# Altium PCB PCB1_HUY.PcbDoc (part 1 of 4)
Units mm, origin at the board's own origin, x right, y up, seen from the top; angles counter-clockwise.
Board outline 93 x 90.05 mm, 2 copper layers (Top Layer, Bottom Layer); 361 components, 379 nets, 1489 pads, 0 vias.
Unrouted connection lines stored in the file: 824.
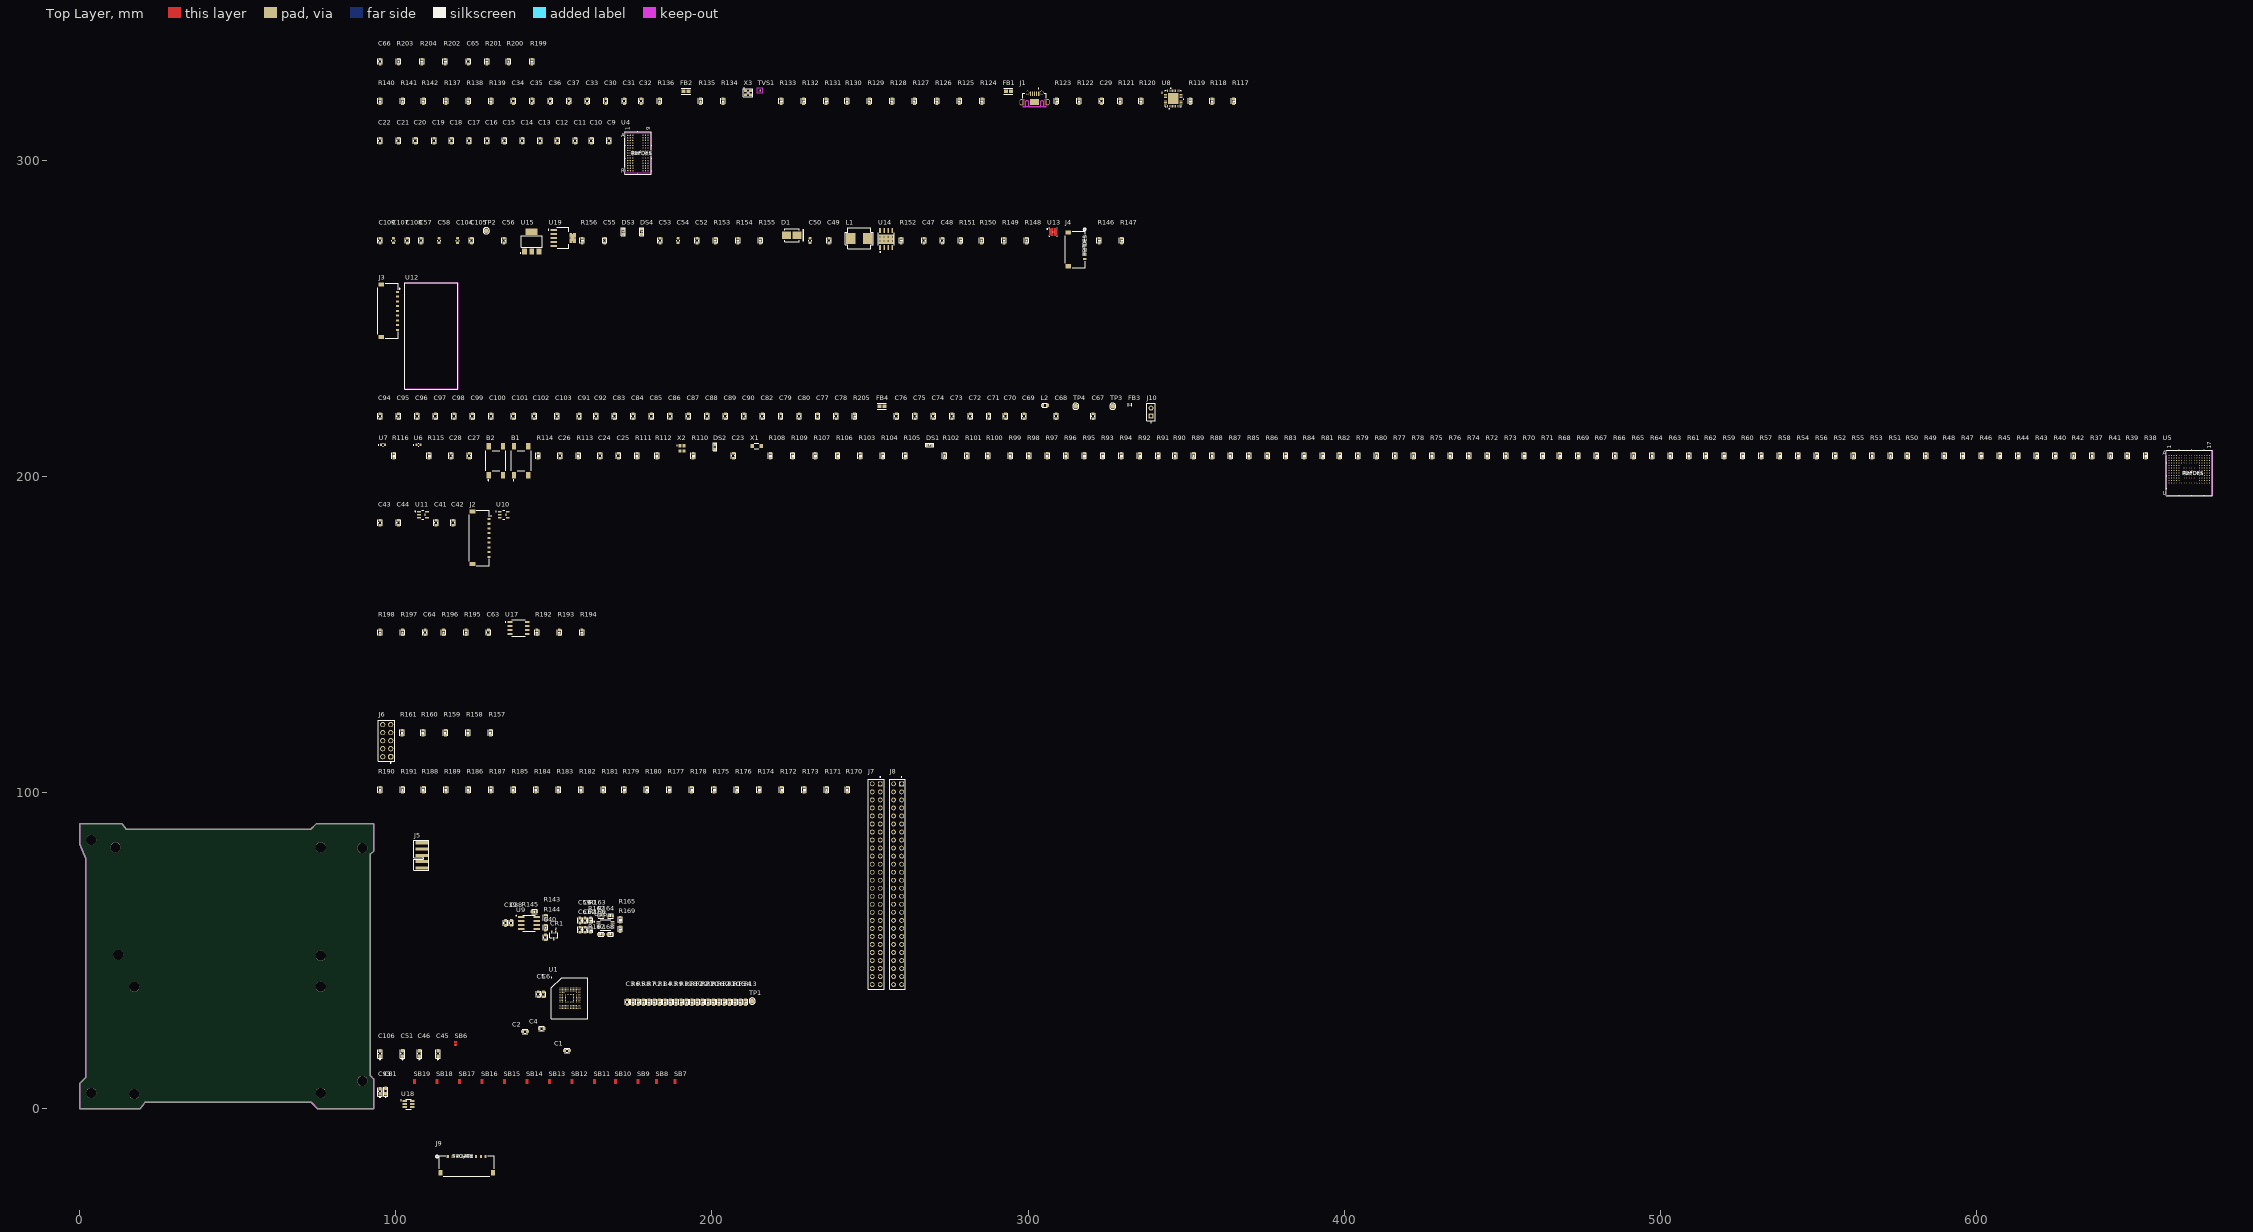
[diagram p0: Top Layer view]
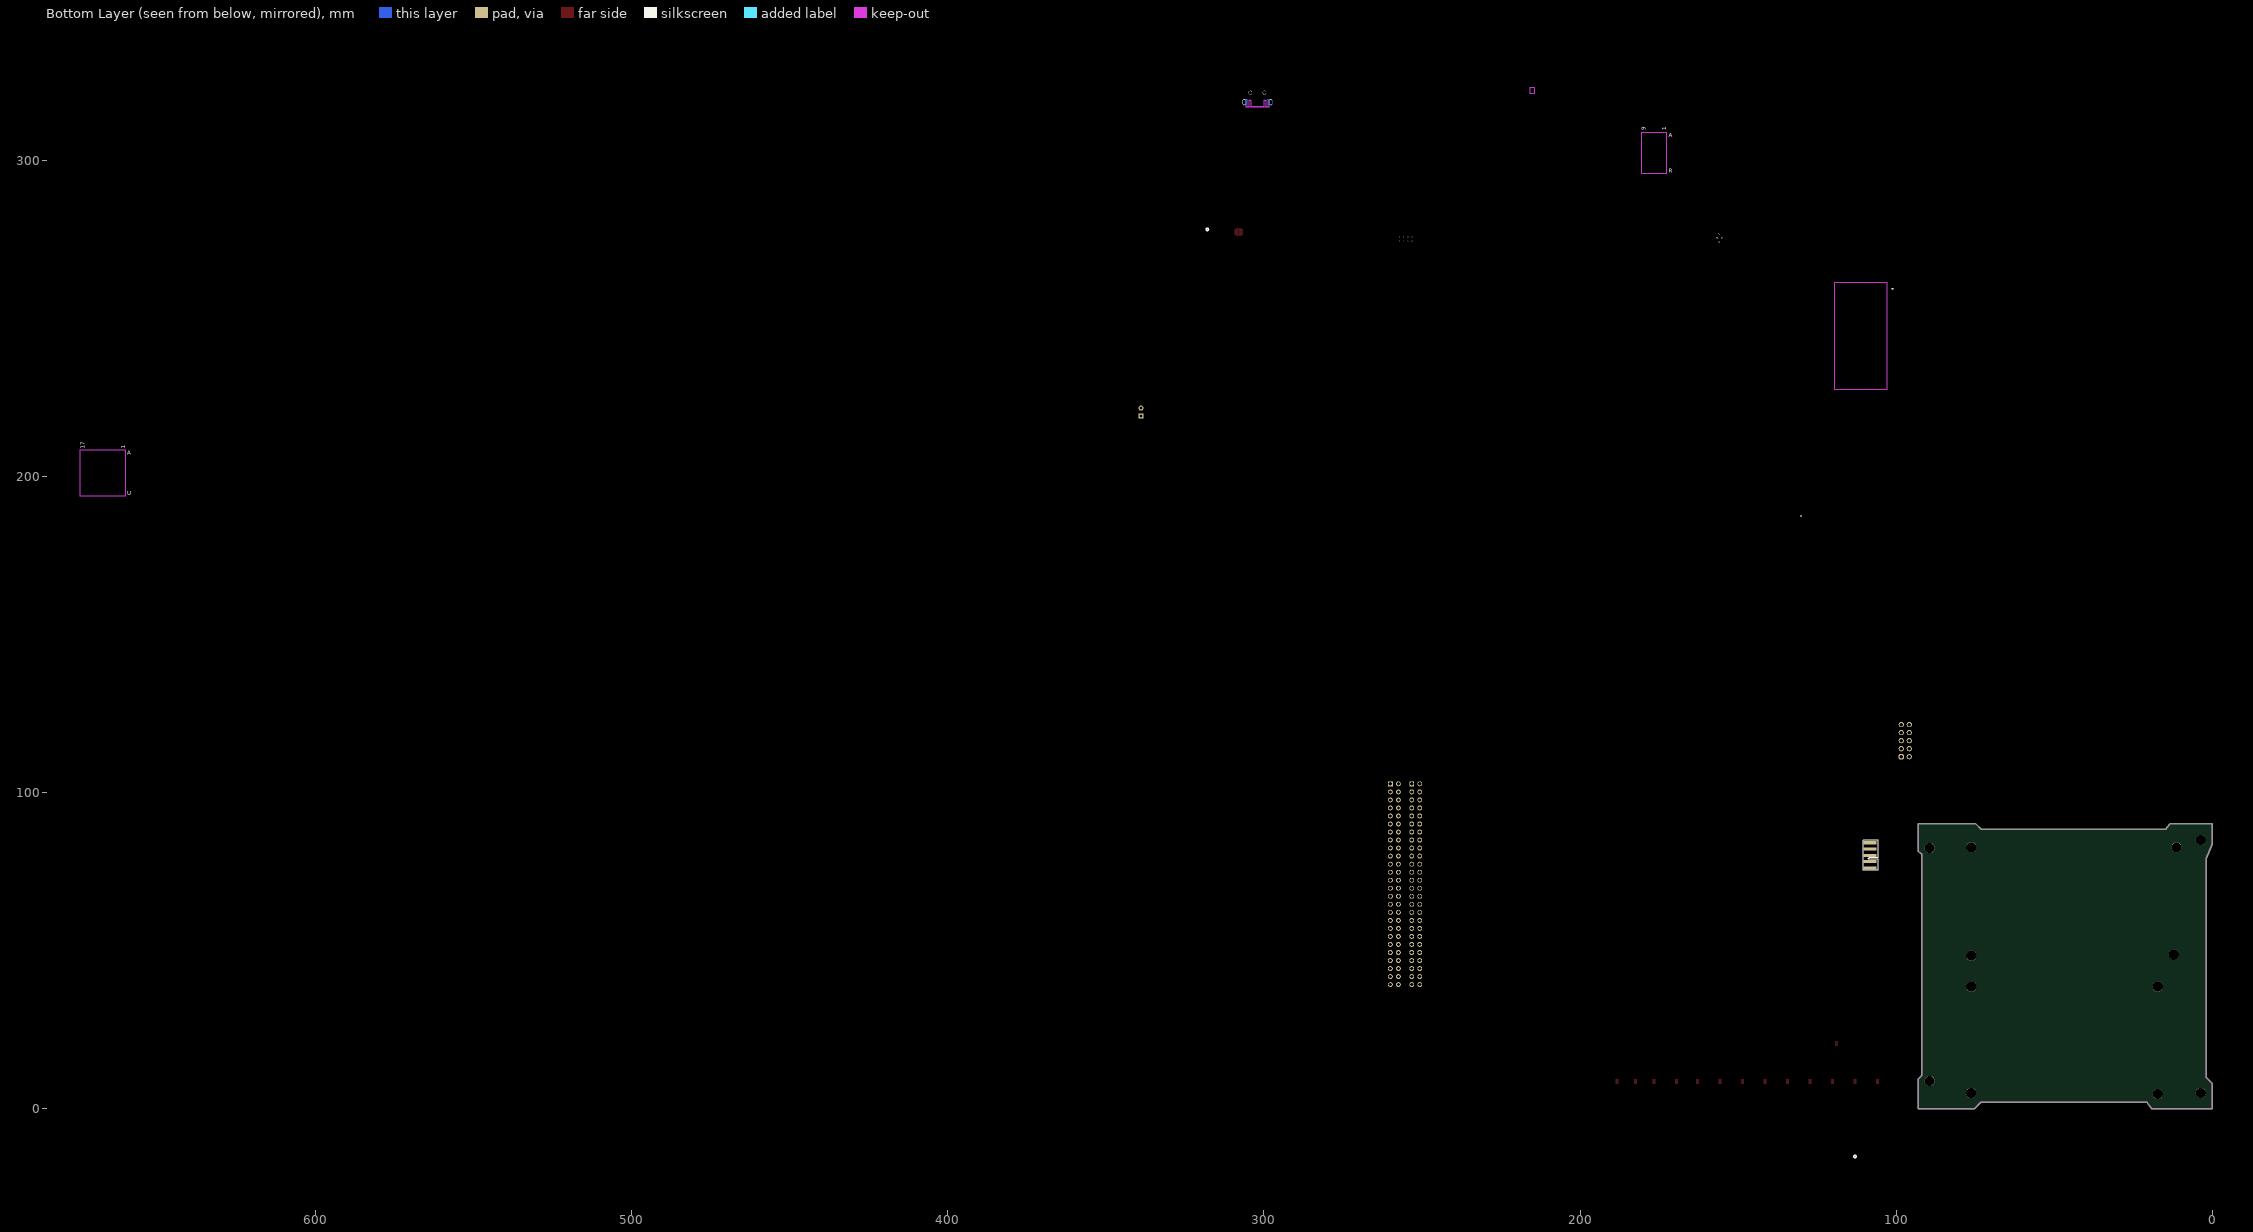
[diagram p1: Bottom Layer view, seen from below]

## Layer stack, top to bottom
Top Solder: solder mask 0.0102, Solder Resist, Dk 3.5
Top Layer: signal copper 0.0356
Dielectric 1: dielectric 0.32, FR-4, Dk 4.8
Bottom Layer: signal copper 0.0356
Bottom Solder: solder mask 0.0102, Solder Resist, Dk 3.5

## Board outline
79.527,0 75.26,0 73.254,2.007 71.831,2.007 20.676,2.007 19.2,0 0,0 0,7.925 0.889,8.814 1.9,9.825 1.9,67.474 1.9,79.126 0,83.713 0,90.05 13.513,90.05 14.753,88.392 73.127,88.392 74.785,90.05 93,90.05 93,82.069 93,81.35 91.9,80.45 91.9,10.525 93,9.425 93,0

## Design rules (kind name [scope] priority, off if disabled: settings)
Clearance ROOM_MCU [WithinRoom('RoomDefinition_1')] p1: gap=0 ignorepadtopadclearanceinfootprint=FALSE
Clearance [All] p2: gap=0.127 ignorepadtopadclearanceinfootprint=FALSE
ComponentClearance [All] p1: gap=0.1 collisioncheckmode=3 verticalgap=0.1 showdistances=FALSE
DiffPairsRouting [All] p1: maxlimit=0.254 minlimit=0.254 mostfreqgap=0.254 toplayer_minwidth=0.381 toplayer_maxwidth=0.381 toplayer_prefwidth=0.381 bottomlayer_minwidth=0.381 bottomlayer_maxwidth=0.381 bottomlayer_prefwidth=0.381 maxuncoupledlength=12.7
MatchedLengths "Schematic Matched Net Lengths_15" [InNet('SDIO1_CMD')] p1: tolerance=2.54 checknetsindiffpair=FALSE checkdiffpairvsdiffpair=TRUE checkxsignals=TRUE checkothers=TRUE
MatchedLengths "Schematic Matched Net Lengths_14" [InNet('SDIO1_CK')] p2: tolerance=2.54 checknetsindiffpair=FALSE checkdiffpairvsdiffpair=TRUE checkxsignals=TRUE checkothers=TRUE
MatchedLengths "Schematic Matched Net Lengths_11" [InNetClass('SDIO1_D[0..7]')] p3: tolerance=2.54 checknetsindiffpair=FALSE checkdiffpairvsdiffpair=TRUE checkxsignals=TRUE checkothers=TRUE
MatchedLengths "Schematic Matched Net Lengths" [InNetClass('SDRAM_A[0..11]')] p4: tolerance=2.54 checknetsindiffpair=FALSE checkdiffpairvsdiffpair=TRUE checkxsignals=TRUE checkothers=TRUE
PolygonConnect [All] p1: connectstyle=Relief reliefconductorwidth=0.254 reliefentries=4 polygonreliefangle="90 Angle" airgapwidth=0.254
RoutingVias [All] p1: holewidth=0.3 width=0.6 viastyle="Through Hole" minholewidth=0.05 minwidth=0.1 maxholewidth=0.8 maxwidth=1
SolderMaskExpansion [All] p1: expansion=0.102 istentingtop=FALSE
SupplyNets "Schematic Supply Nets_23" [InNet('5V')] p1: voltage=0.000
SupplyNets "Schematic Supply Nets_19" [InNet('3V3')] p2: voltage=0.000
SupplyNets "Schematic Supply Nets_22" [InNet('VDDA')] p3: voltage=0.000
SupplyNets "Schematic Supply Nets_21" [InNet('12V')] p4: voltage=0.000
SupplyNets "Schematic Supply Nets_20" [InNet('5V_SW1')] p5: voltage=0.000
SupplyNets "Schematic Supply Nets_17" [InNet('3V3_SW3')] p6: voltage=0.000
SupplyNets "Schematic Supply Nets_16" [InNet('VDD_MCU')] p7: voltage=0.000
SupplyNets "Schematic Supply Nets_15" [InNet('3V3_SW1')] p8: voltage=0.000
SupplyNets "Schematic Supply Nets_14" [InNet('1V8')] p9: voltage=0.000
SupplyNets "Schematic Supply Nets_13" [InNet('VBAT_BUS')] p10: voltage=0.000
SupplyNets "Schematic Supply Nets_12" [InNet('12V_CONN')] p11: voltage=0.000
SupplyNets "Schematic Supply Nets_11" [InNet('5V_BUS')] p12: voltage=0.000
SupplyNets "Schematic Supply Nets_10" [InNet('VDD_SDC')] p13: voltage=0.000
SupplyNets "Schematic Supply Nets_9" [InNet('3V3_BUS')] p14: voltage=0.000
SupplyNets "Schematic Supply Nets_8" [InNet('GND')] p15: voltage=0.000
SupplyNets "Schematic Supply Nets_7" [InNet('GND-SD')] p16: voltage=0.000
SupplyNets "Schematic Supply Nets_6" [InNet('5V_SW3')] p17: voltage=0.000
SupplyNets "Schematic Supply Nets_4" [InNet('VBUS')] p18: voltage=0.000
SupplyNets "Schematic Supply Nets_3" [InNet('5V_SW2')] p19: voltage=0.000
SupplyNets "Schematic Supply Nets_2" [InNet('3V3_SW2')] p20: voltage=0.000
SupplyNets "Schematic Supply Nets" [InNet('3.3V')] p21: voltage=0.000
Width [All] p1: maxlimit=0.254 minlimit=0.254 preferedwidth=0.254
28 further rules are at their usual default settings.

## Classes and differential pairs
net class SDRAM_D[0..31]: SDRAM_D0 SDRAM_D1 SDRAM_D2 SDRAM_D3 SDRAM_D4 SDRAM_D5 SDRAM_D6 SDRAM_D7 SDRAM_D8 SDRAM_D9 SDRAM_D10 SDRAM_D11 SDRAM_D12 SDRAM_D13 SDRAM_D14 SDRAM_D15 SDRAM_D16 SDRAM_D17 SDRAM_D18 SDRAM_D19 SDRAM_D20 SDRAM_D21 SDRAM_D22 SDRAM_D23 SDRAM_D24 SDRAM_D25 SDRAM_D26 SDRAM_D27 SDRAM_D28 SDRAM_D29 SDRAM_D30 SDRAM_D31
net class ULPI_D[0..7]: ULPI_D0 ULPI_D1 ULPI_D2 ULPI_D3 ULPI_D4 ULPI_D5 ULPI_D6 ULPI_D7
net class SDRAM_A[0..11]: SDRAM_A0 SDRAM_A1 SDRAM_A2 SDRAM_A3 SDRAM_A4 SDRAM_A5 SDRAM_A6 SDRAM_A7 SDRAM_A8 SDRAM_A9 SDRAM_A10 SDRAM_A11
net class SDIO1_D[0..7]: SDIO1_D0 SDIO1_D1 SDIO1_D2 SDIO1_D3 SDIO1_D4 SDIO1_D5 SDIO1_D6 SDIO1_D7
net class N000-1_[0..9]: FPGA_D0 FPGA_D1 FPGA_D2 FPGA_D3 FPGA_D4 FPGA_D5 FPGA_D6 FPGA_D7 FPGA_D8 FPGA_D9
net class N000-2_[0..4]: FPGA_STATUS0 FPGA_STATUS1 FPGA_STATUS2 FPGA_STATUS3 FPGA_STATUS4
component class WATCHDOG: C65 C66 R199 R200 R201 R202 R203 R204 U18
component class USB_HS_DEVICE: C29 C30 C31 C32 C33 C34 C35 C36 C37 FB1 FB2 J1 L4 L5 R117 R118 R119 R120 R121 R122 R123 R124 R125 R126 R127 R128 R129 R130 R131 R132 R133 R134 R135 R136 R137 R138 R139 R140 R141 R142 TVS1 U8 X3
component class SDRAM: C9 C10 C11 C12 C13 C14 C15 C16 C17 C18 C19 C20 C21 C22 U4
component class POWER: C45 C46 C47 C48 C49 C50 C51 C52 C53 C54 C55 C56 C57 C58 C104 C105 C106 C107 C108 C109 D1 DS3 DS4 J4 L1 R146 R147 R148 R149 R150 R151 R152 R153 R154 R155 R156 SB6 TP2 U13 U14 U15 U19
component class MODULE_FPGA: J3 U12
component class MCU: B1 B2 C23 C24 C25 C26 C27 C28 DS1 DS2 HW9 HW10 LD1 LD2 R37 R38 R39 R40 R41 R42 R43 R44 R45 R46 R47 R48 R49 R50 R51 R52 R53 R54 R55 R56 R57 R58 R59 R60 R61 R62 R63 R64 R65 R66 R67 R68 R69 R70 R71 R72 R73 R74 R75 R76 R77 R78 R79 R80 R81 R82 R83 R84 R85 R86 R87 R88 R89 R90 R91 R92 R93 R94 R95 R96 R97 R98 R99 R100 R101 R102 R103 R104 R105 R106 R107 R108 R109 R110 R111 R112 R113 R114 R115 R116 U5 U6 U7 X1 X2
component class MCU_POWER: C67 C68 C69 C70 C71 C72 C73 C74 C75 C76 C77 C78 C79 C80 C81 C82 C83 C84 C85 C86 C87 C88 C89 C90 C91 C92 C93 C94 C95 C96 C97 C98 C99 C100 C101 C102 C103 FB3 FB4 HW11 J10 JP1 L2 L3 R205 SB7 SB8 SB9 SB10 SB11 SB12 SB13 SB14 SB15 SB16 SB17 SB18 SB19 TP3 TP4
component class LVDS: C41 C42 C43 C44 J2 U10 U11
component class I2C: C59 C60 C61 C62 R162 R163 R164 R165 R166 R167 R168 R169 U16
component class FRAM: C63 C64 R192 R193 R194 R195 R196 R197 R198 U17
component class eMMC: C1 C2 C3 C4 C5 C6 R1 R2 R3 R4 R5 R6 R7 R8 R9 R10 R11 R12 R13 R14 R15 R16 R17 R18 R19 R20 R21 R22 TP1 U1
component class DEBUG: J5 J6 R157 R158 R159 R160 R161
component class CONNECTOR: J7 J8 R170 R171 R172 R173 R174 R175 R176 R177 R178 R179 R180 R181 R182 R183 R184 R185 R186 R187 R188 R189 R190 R191
component class CONNECT_EXP: J9
component class CAN: C38 C39 C40 CR1 R143 R144 R145 U9
differential pair USB_HS: +USB_HS_P -USB_HS_N
differential pair LVDS_TxD: +LVDS_TxD_P -LVDS_TxD_N
differential pair LVDS_TxC: +LVDS_TxC_P -LVDS_TxC_N
differential pair FPGA_TxD: +FPGA_TxD_P -FPGA_TxD_N
differential pair FPGA_TxC: +FPGA_TxC_P -FPGA_TxC_N

## Components (designator, comment, footprint, x,y, rotation, side; value= is the part's Value field where it differs from the comment)
B1 "4-1437565-1" FP-4-1437565-1-MFG 139.649,204.927 r90 top
B2 "4-1437565-1" FP-4-1437565-1-MFG 131.674,204.927 r90 top
C1 "100nF/16V" CAP_C_1608X80 154.153,18.364 r0 top value=33pF
C2 "2.2uF/10V" CAP_C_1608X80 140.881,24.409 r0 top value=33pF
C3 "100nF/16V" CAP_C_1608X80 173.253,33.705 r90 top value=33pF
C4 "2.2uF/10V" CAP_C_1608X80 146.126,25.375 r0 top value=33pF
C5 "100nF/16V" CAP_C_1608X80 145.085,36.175 r90 top value=33pF
C6 "2.2uF/10V" CAP_C_1608X80 146.71,36.144 r90 top value=33pF
C9 "100nF/16V" CAP_C_1608X80 167.437,306.146 r90 top value=33pF
C10 "100nF/16V" CAP_C_1608X80 161.849,306.146 r90 top value=33pF
C11 "100nF/16V" CAP_C_1608X80 156.769,306.146 r90 top value=33pF
C12 "100nF/16V" CAP_C_1608X80 151.181,306.146 r90 top value=33pF
C13 "100nF/16V" CAP_C_1608X80 145.593,306.146 r90 top value=33pF
C14 "100nF/16V" CAP_C_1608X80 140.005,306.146 r90 top value=33pF
C15 "100nF/16V" CAP_C_1608X80 134.417,306.146 r90 top value=33pF
C16 "100nF/16V" CAP_C_1608X80 128.829,306.146 r90 top value=33pF
C17 "100nF/16V" CAP_C_1608X80 123.241,306.146 r90 top value=33pF
C18 "100nF/16V" CAP_C_1608X80 117.653,306.146 r90 top value=33pF
C19 "100nF/16V" CAP_C_1608X80 112.065,306.146 r90 top value=33pF
C20 "100nF/16V" CAP_C_1608X80 106.223,306.146 r90 top value=33pF
C21 "100nF/16V" CAP_C_1608X80 100.889,306.146 r90 top value=33pF
C22 "100nF/16V" CAP_C_1608X80 95.047,306.146 r90 top value=33pF
C23 "10nF/16V" CAP_C_1608X80 206.781,206.502 r90 top value=33pF
C24 "1.5pF/50V" CAP_C_1608X80 164.592,206.502 r90 top value=33pF
C25 "1.5pF/50V" CAP_C_1608X80 170.434,206.502 r90 top value=33pF
C26 "100nF/16V" CAP_C_1608X80 151.917,206.502 r90 top value=33pF
C27 "1.5pF/50V" CAP_C_1608X80 123.266,206.502 r90 top value=33pF
C28 "100nF/16V" CAP_C_1608X80 117.424,206.502 r90 top value=33pF
C29 "100nF/16V" CAP_C_1608X80 323.24,318.668 r90 top value=33pF
C30 "100nF/16V" CAP_C_1608X80 166.421,318.668 r90 top value=33pF
C31 "100nF/16V" CAP_C_1608X80 172.263,318.668 r90 top value=33pF
C32 "100nF/16V" CAP_C_1608X80 177.597,318.668 r90 top value=33pF
C33 "100nF/16V" CAP_C_1608X80 160.579,318.668 r90 top value=33pF
C34 "100nF/16V" CAP_C_1608X80 137.211,318.668 r90 top value=33pF
C35 "100nF/16V" CAP_C_1608X80 143.053,318.668 r90 top value=33pF
C36 "100nF/16V" CAP_C_1608X80 148.895,318.668 r90 top value=33pF
C37 "2.2uF/10V" CAP_C_1608X80 154.737,318.668 r90 top value=33pF
C38 "100nF/16V" CAP_C_1608X80 136.525,58.75 r90 top value=33pF
C39 "100nF/16V" CAP_C_1608X80 134.746,58.736 r90 top value=33pF
C40 "4.7nF/16V" CAP_C_1608X80 147.345,54.186 r270 top value=33pF
C41 "10uF/16V" CAP_C_1608X80 112.751,185.344 r90 top value=33pF
C42 "1uF/16V" CAP_C_1608X80 118.085,185.344 r90 top value=33pF
C43 "10uF/16V" CAP_C_1608X80 95.047,185.344 r90 top value=33pF
C44 "1uF/16V" CAP_C_1608X80 100.889,185.344 r90 top value=33pF
C45 "33uF/16V" CAP_MP_1608X90 113.335,17.501 r90 top
C46 "33uF/16V" CAP_MP_1608X90 107.493,17.501 r90 top
C47 "2.2nF/25V" CAP_C_1608X80 267.005,274.549 r90 top
C48 "2.2nF/25V" CAP_C_1608X80 272.847,274.549 r90 top
C49 "0.01uF/16V" CAP_C_1608X80 237.007,274.549 r90 top value=33pF
C50 "0.22uF/16V" CAP_C_1608X80_L 231.064,274.549 r90 top value=33pF
C51 "33uF/16V" CAP_MP_1608X90 102.159,17.501 r90 top
C52 "0.22uF/10V" CAP_C_1608X80 195.275,274.549 r90 top value=33pF
C53 "0.22uF/10V" CAP_C_1608X80 183.617,274.549 r90 top value=33pF
C54 "0.22uF/16V" CAP_C_1608X80_L 189.332,274.549 r90 top value=33pF
C55 "0.22uF/10V" CAP_C_1608X80 166.091,274.549 r90 top value=33pF
C56 "0.22uF/10V" CAP_C_1608X80 134.163,274.549 r90 top value=33pF
C57 "0.22uF/10V" CAP_C_1608X80 108.001,274.549 r90 top value=33pF
C58 "10uF/25V" CAP_C_1608X80_L 113.741,274.549 r90 top value=33pF
C59 "1uF/16V" CAP_C_1608X80 158.227,59.535 r90 top value=33pF
C60 "0.22uF" CAP_C_1608X80 159.852,59.538 r90 top value=33pF
C61 "1uF/16V" CAP_C_1608X80 158.227,56.585 r90 top value=33pF
C62 "0.22uF" CAP_C_1608X80 159.853,56.585 r90 top value=33pF
C63 "0.22uF/10V" CAP_C_1608X80 129.337,150.647 r90 top value=33pF
C64 "0.22uF/10V" CAP_C_1608X80 109.271,150.647 r90 top value=33pF
C65 "220nF/10V" CAP_C_1608X80 122.987,331.191 r90 top value=33pF
C66 "220nF/10V" CAP_C_1608X80 95.047,331.191 r90 top value=33pF
C67 "10uF/6V3" CAP_C_1608X80 320.573,219.024 r90 top value=33pF
C68 "220pF/16V" CAP_C_1608X80 308.889,219.024 r90 top value=33pF
C69 "10uF/6V3" CAP_C_1608X80 298.729,219.024 r90 top value=33pF
C70 "4.7uF/6V3" CAP_C_1608X80 292.887,219.024 r90 top value=33pF
C71 "4.7uF/6V3" CAP_C_1608X80 287.553,219.024 r90 top value=33pF
C72 "4.7uF/6V3" CAP_C_1608X80 281.711,219.024 r90 top value=33pF
C73 "2.2uF/10V" CAP_C_1608X80 275.869,219.024 r90 top value=33pF
C74 "2.2uF/10V" CAP_C_1608X80 270.027,219.024 r90 top value=33pF
C75 "2.2uF/10V" CAP_C_1608X80 264.185,219.024 r90 top value=33pF
C76 "1uF/16V" CAP_C_1608X80 258.343,219.024 r90 top value=33pF
C77 "2.2uF/10V" CAP_C_1608X80 233.451,219.024 r90 top value=33pF
C78 "100nF/16V" CAP_C_1608X80 239.293,219.024 r90 top value=33pF
C79 "100nF/16V" CAP_C_1608X80 221.767,219.024 r90 top value=33pF
C80 "100nF/16V" CAP_C_1608X80 227.609,219.024 r90 top value=33pF
C81 "1uF/35V" CAP_MP_1608X90 96.826,5.615 r90 top
C82 "10uF/16V" CAP_C_1608X80 215.925,219.024 r90 top value=33pF
C83 "100nF/16V" CAP_C_1608X80 169.215,219.024 r90 top value=33pF
C84 "100nF/16V" CAP_C_1608X80 175.057,219.024 r90 top value=33pF
C85 "100nF/16V" CAP_C_1608X80 180.899,219.024 r90 top value=33pF
C86 "100nF/16V" CAP_C_1608X80 186.741,219.024 r90 top value=33pF
C87 "100nF/16V" CAP_C_1608X80 192.583,219.024 r90 top value=33pF
C88 "100nF/16V" CAP_C_1608X80 198.425,219.024 r90 top value=33pF
C89 "100nF/16V" CAP_C_1608X80 204.241,219.024 r90 top value=33pF
C90 "100nF/16V" CAP_C_1608X80 210.083,219.024 r90 top value=33pF
C91 "100nF/16V" CAP_C_1608X80 158.039,219.024 r90 top value=33pF
C92 "100nF/16V" CAP_C_1608X80 163.373,219.024 r90 top value=33pF
C93 "4.7uF/16V" CAP_MP_1608X90 95.047,5.512 r90 top
C94 "100nF/16V" CAP_C_1608X80 95.047,219.024 r90 top value=33pF
C95 "100nF/16V" CAP_C_1608X80 100.889,219.024 r90 top value=33pF
C96 "100nF/16V" CAP_C_1608X80 106.731,219.024 r90 top value=33pF
C97 "100nF/16V" CAP_C_1608X80 112.573,219.024 r90 top value=33pF
C98 "100nF/16V" CAP_C_1608X80 118.415,219.024 r90 top value=33pF
C99 "100nF/16V" CAP_C_1608X80 124.257,219.024 r90 top value=33pF
C100 "100nF/16V" CAP_C_1608X80 130.099,219.024 r90 top value=33pF
C101 "100nF/16V" CAP_C_1608X80 137.211,219.024 r90 top value=33pF
C102 "100nF/16V" CAP_C_1608X80 143.815,219.024 r90 top value=33pF
C103 "100nF/16V" CAP_C_1608X80 150.927,219.024 r90 top value=33pF
C104 "0.22uF/16V" CAP_C_1608X80_L 119.583,274.549 r90 top value=33pF
C105 "0.22uF/10V" CAP_C_1608X80 124.003,274.549 r90 top value=33pF
C106 "33uF/16V" CAP_MP_1608X90 95.047,17.501 r90 top
C107 "0.22uF/16V" CAP_C_1608X80_L 99.263,274.549 r90 top value=33pF
C108 "0.22uF/10V" CAP_C_1608X80 103.683,274.549 r90 top value=33pF
C109 "0.22uF/10V" CAP_C_1608X80 95.047,274.549 r90 top value=33pF
CR1 "ESDCAN02-2BWY" SOT323-3L_STM 150.002,54.813 r180 top
D1 "SS54B" JCET-SMB-2_M 225.298,276.25 r0 top
DS1 "LED_green" LED-0603-GREEN 268.884,209.956 r0 top value=GREEN
DS2 "LED_red" LED-0603-RED 200.939,209.321 r90 top value=RED
DS3 "LED_red" LED-0603-RED 171.933,277.368 r90 top value=RED
DS4 "LED_green" LED-0603-GREEN 177.775,277.368 r90 top value=GREEN
FB1 "BLM18PG121SN1D" FP-BLM18-0_15-t0_8-IPC_A 293.751,321.767 r0 top
FB2 "BLM18PG121SN1D" FP-BLM18-0_15-t0_8-IPC_A 191.795,321.767 r0 top
FB3 "BLM03PG330SN1D" FP-BLM03-0_03-d0_3-IPC_C 332.156,222.631 r90 top
FB4 "BLM18KG601SN1D" FP-BLM18-0_15-t0_8-IPC_A 253.746,222.123 r0 top
J1 "47590-0001" MOLEX_47590-0001 302.031,318.338 r0 top
J2 "5040500991" 5040500991 126.416,180.518 r90 top
J3 "5040500991" 5040500991 97.536,252.349 r90 top
J4 "5040500591" CONN_5040500591_MOL 314.858,271.755 r90 top
J5 "009159010061911" 009159010061911 108.306,76.13 r90 top
J6 "61301021121" 61301021121 97.13,116.408 r90 top
J7 "ESQ-126-14-G-D" ESQ-126-14-G-D 251.968,70.993 r90 top
J8 "ESQ-126-14-G-D" ESQ-126-14-G-D 258.724,70.993 r90 top
J9 "5040500991" CONN_5040500991_MOL 122.427,-18.13 r180 top
J10 "TSW-102-07-G-S" FP-TSW-102-07-G-S-MFG 338.861,220.32 r90 top
L1 "SRP7050TA-220M" SRP7050TA-220M 246.583,275.26 r0 top
L2 "10uH" INDC1608X95N 305.308,222.479 r0 top
R1 "47k" RES_C_1608X60 183.465,33.705 r90 top
R2 "47k" RES_C_1608X60 181.765,33.705 r90 top
R3 "47k" RES_C_1608X60 186.865,33.705 r90 top
R4 "47k" RES_C_1608X60 185.165,33.705 r90 top
R5 "47k" RES_C_1608X60 176.665,33.705 r90 top
R6 "47k" RES_C_1608X60 174.965,33.705 r90 top
R7 "47k" RES_C_1608X60 180.065,33.705 r90 top
R8 "47k" RES_C_1608X60 178.365,33.705 r90 top
R9 "22R" RES_C_1608X60 188.565,33.705 r90 top
R10 "22R" RES_C_1608X60 205.565,33.705 r90 top
R11 "22R" RES_C_1608X60 203.865,33.705 r90 top
R12 "22R" RES_C_1608X60 202.165,33.705 r90 top
R13 "22R" RES_C_1608X60 210.665,33.705 r90 top
R14 "22R" RES_C_1608X60 208.965,33.705 r90 top
R15 "22R" RES_C_1608X60 207.265,33.705 r90 top
R16 "22R" RES_C_1608X60 200.465,33.705 r90 top
R17 "47k" RES_C_1608X60 193.665,33.705 r90 top
R18 "10k" RES_C_1608X60 191.965,33.705 r90 top
R19 "0R" RES_C_1608X60 190.265,33.705 r90 top
R20 "22R" RES_C_1608X60 198.765,33.705 r90 top
R21 "22R" RES_C_1608X60 197.065,33.705 r90 top
R22 "47k" RES_C_1608X60 195.365,33.705 r90 top
R37 "33R" RES_C_1608X60 636.473,206.502 r90 top
R38 "33R" RES_C_1608X60 653.491,206.502 r90 top
R39 "33R" RES_C_1608X60 647.649,206.502 r90 top
R40 "33R" RES_C_1608X60 624.815,206.502 r90 top
R41 "33R" RES_C_1608X60 642.315,206.502 r90 top
R42 "33R" RES_C_1608X60 630.631,206.502 r90 top
R43 "33R" RES_C_1608X60 618.973,206.502 r90 top
R44 "33R" RES_C_1608X60 613.131,206.502 r90 top
R45 "33R" RES_C_1608X60 607.289,206.502 r90 top
R46 "33R" RES_C_1608X60 601.447,206.502 r90 top
R47 "33R" RES_C_1608X60 595.605,206.502 r90 top
R48 "33R" RES_C_1608X60 589.763,206.502 r90 top
R49 "33R" RES_C_1608X60 583.921,206.502 r90 top
R50 "33R" RES_C_1608X60 578.079,206.502 r90 top
R51 "33R" RES_C_1608X60 572.745,206.502 r90 top
R52 "33R" RES_C_1608X60 555.219,206.502 r90 top
R53 "33R" RES_C_1608X60 566.903,206.502 r90 top
R54 "33R" RES_C_1608X60 543.535,206.502 r90 top
R55 "33R" RES_C_1608X60 561.061,206.502 r90 top
R56 "33R" RES_C_1608X60 549.377,206.502 r90 top
R57 "33R" RES_C_1608X60 531.851,206.502 r90 top
R58 "33R" RES_C_1608X60 537.693,206.502 r90 top
R59 "33R" RES_C_1608X60 520.167,206.502 r90 top
R60 "33R" RES_C_1608X60 526.009,206.502 r90 top
R61 "33R" RES_C_1608X60 508.991,206.502 r90 top
R62 "33R" RES_C_1608X60 514.325,206.502 r90 top
R63 "33R" RES_C_1608X60 503.149,206.502 r90 top
R64 "33R" RES_C_1608X60 497.307,206.502 r90 top
R65 "33R" RES_C_1608X60 491.465,206.502 r90 top
R66 "33R" RES_C_1608X60 485.623,206.502 r90 top
R67 "33R" RES_C_1608X60 479.781,206.502 r90 top
R68 "33R" RES_C_1608X60 468.097,206.502 r90 top
R69 "33R" RES_C_1608X60 473.939,206.502 r90 top
R70 "33R" RES_C_1608X60 456.921,206.502 r90 top
R71 "33R" RES_C_1608X60 462.763,206.502 r90 top
R72 "33R" RES_C_1608X60 445.237,206.502 r90 top
R73 "33R" RES_C_1608X60 451.079,206.502 r90 top
R74 "33R" RES_C_1608X60 439.395,206.502 r90 top
R75 "33R" RES_C_1608X60 427.711,206.502 r90 top
R76 "33R" RES_C_1608X60 433.553,206.502 r90 top
R77 "33R" RES_C_1608X60 416.027,206.502 r90 top
R78 "33R" RES_C_1608X60 421.869,206.502 r90 top
R79 "33R" RES_C_1608X60 404.343,206.502 r90 top
R80 "33R" RES_C_1608X60 410.185,206.502 r90 top
R81 "33R" RES_C_1608X60 393.167,206.502 r90 top
R82 "33R" RES_C_1608X60 398.501,206.502 r90 top
R83 "33R" RES_C_1608X60 381.483,206.502 r90 top
R84 "33R" RES_C_1608X60 387.325,206.502 r90 top
R85 "33R" RES_C_1608X60 369.824,206.502 r90 top
R86 "33R" RES_C_1608X60 375.666,206.502 r90 top
R87 "33R" RES_C_1608X60 363.982,206.502 r90 top
R88 "33R" RES_C_1608X60 358.14,206.502 r90 top
R89 "33R" RES_C_1608X60 352.298,206.502 r90 top
R90 "33R" RES_C_1608X60 346.456,206.502 r90 top
R91 "33R" RES_C_1608X60 341.122,206.502 r90 top
R92 "33R" RES_C_1608X60 335.28,206.502 r90 top
R93 "33R" RES_C_1608X60 323.596,206.502 r90 top
R94 "51R" RES_C_1608X60 329.438,206.502 r90 top
R95 "33R" RES_C_1608X60 317.754,206.502 r90 top
R96 "33R" RES_C_1608X60 311.912,206.502 r90 top
R97 "33R" RES_C_1608X60 306.07,206.502 r90 top
R98 "33R" RES_C_1608X60 300.228,206.502 r90 top
R99 "33R" RES_C_1608X60 294.386,206.502 r90 top
R100 "33R" RES_C_1608X60 287.274,206.502 r90 top
R101 "33R" RES_C_1608X60 280.67,206.502 r90 top
R102 "33R" RES_C_1608X60 273.558,206.502 r90 top
R103 "0R" RES_C_1608X60 246.888,206.502 r90 top
R104 "0R" RES_C_1608X60 254,206.502 r90 top
R105 "33R" RES_C_1608X60 261.112,206.502 r90 top
R106 "1k" RES_C_1608X60 239.776,206.502 r90 top
R107 "1k" RES_C_1608X60 232.664,206.502 r90 top
R108 "10k" RES_C_1608X60 218.44,206.502 r90 top
R109 "10k (DNP)" RES_C_1608X60 225.552,206.502 r90 top
R110 "1k" RES_C_1608X60 194.056,206.502 r90 top
R111 "10k" RES_C_1608X60 176.251,206.502 r90 top
R112 "10k" RES_C_1608X60 182.601,206.502 r90 top
R113 "10k" RES_C_1608X60 157.734,206.502 r90 top
R114 "100R" RES_C_1608X60 145.034,206.502 r90 top
R115 "330R" RES_C_1608X60 110.541,206.502 r90 top
R116 "220k" RES_C_1608X60 99.365,206.502 r90 top
R117 "0R" RES_C_1608X60 364.998,318.668 r90 top
R118 "0R" RES_C_1608X60 358.14,318.668 r90 top
R119 "0R" RES_C_1608X60 351.282,318.668 r90 top
R120 "0R" RES_C_1608X60 335.661,318.668 r90 top
R121 "0R" RES_C_1608X60 329.057,318.668 r90 top
R122 "0R" RES_C_1608X60 316.103,318.668 r90 top
R123 "33R" RES_C_1608X60 308.991,318.668 r90 top
R124 "8.06k" RES_C_1608X60 285.369,318.668 r90 top
R125 "10k 1%" RES_C_1608X60 278.257,318.668 r90 top
R126 "0R" RES_C_1608X60 271.145,318.668 r90 top
R127 "0R" RES_C_1608X60 264.033,318.668 r90 top
R128 "0R" RES_C_1608X60 256.921,318.668 r90 top
R129 "0R" RES_C_1608X60 249.809,318.668 r90 top
R130 "0R" RES_C_1608X60 242.697,318.668 r90 top
R131 "0R" RES_C_1608X60 236.093,318.668 r90 top
R132 "0R" RES_C_1608X60 228.981,318.668 r90 top
R133 "0R" RES_C_1608X60 221.869,318.668 r90 top
R134 "51R" RES_C_1608X60 203.479,318.668 r90 top
R135 "10k" RES_C_1608X60 196.367,318.668 r90 top
R136 "4.7k" RES_C_1608X60 183.413,318.668 r90 top
R137 "0R" RES_C_1608X60 115.849,318.668 r90 top
R138 "0R" RES_C_1608X60 122.961,318.668 r90 top
R139 "0R" RES_C_1608X60 130.073,318.668 r90 top
R140 "0R (DNP)" RES_C_1608X60 95.021,318.668 r90 top
R141 "0R (DNP)" RES_C_1608X60 102.133,318.668 r90 top
R142 "0R (DNP)" RES_C_1608X60 108.737,318.668 r90 top
R143 "60R" RES_C_1608X60 147.345,60.394 r270 top
R144 "60R" RES_C_1608X60 147.345,57.29 r270 top
R145 "10k" RES_C_1608X60 143.845,62.32 r0 top
R146 "10k" RES_C_1608X60 322.453,274.549 r90 top
R147 "10k" RES_C_1608X60 329.565,274.549 r90 top
R148 "470k" RES_C_1608X60 299.491,274.549 r90 top
R149 "22R" RES_C_1608X60 292.379,274.549 r90 top
R150 "11k" RES_C_1608X60 285.267,274.549 r90 top
R151 "47k" RES_C_1608X60 278.663,274.549 r90 top
R152 "3.3k" RES_C_1608X60 259.867,274.549 r90 top
R153 "4.7k" RES_C_1608X60 201.092,274.549 r90 top
R154 "1k" RES_C_1608X60 208.204,274.549 r90 top
R155 "10k" RES_C_1608X60 215.316,274.549 r90 top
R156 "3.24k" RES_C_1608X60 158.953,274.549 r90 top
R157 "22R" RES_C_1608X60 129.921,118.897 r90 top
R158 "22R" RES_C_1608X60 122.809,118.897 r90 top
R159 "22R" RES_C_1608X60 115.697,118.897 r90 top
R160 "22R" RES_C_1608X60 108.585,118.897 r90 top
R161 "22R" RES_C_1608X60 101.981,118.897 r90 top
R162 "4.7 KOhm" RES_C_1608X60 164.897,61.011 r0 top
R163 "4.7 KOhm" RES_C_1608X60 161.643,59.528 r270 top
R164 "4.7 KOhm" RES_C_1608X60 167.894,61.011 r180 top
R165 "4.7 KOhm" RES_C_1608X60 170.993,59.757 r270 top
R166 "22R" RES_C_1608X60 161.643,56.578 r270 top
R167 "22R" RES_C_1608X60 164.897,55.169 r0 top
R168 "22R" RES_C_1608X60 167.894,55.169 r0 top
R169 "10 KOhm" RES_C_1608X60 170.993,56.807 r270 top
R170 "22R" RES_C_1608X60 242.849,100.889 r90 top
R171 "22R" RES_C_1608X60 236.245,100.889 r90 top
R172 "22R" RES_C_1608X60 222.021,100.889 r90 top
R173 "22R" RES_C_1608X60 229.133,100.889 r90 top
R174 "22R" RES_C_1608X60 214.909,100.889 r90 top
R175 "22R" RES_C_1608X60 200.685,100.889 r90 top
R176 "22R" RES_C_1608X60 207.797,100.889 r90 top
R177 "22R" RES_C_1608X60 186.461,100.889 r90 top
R178 "22R" RES_C_1608X60 193.573,100.889 r90 top
R179 "22R" RES_C_1608X60 172.237,100.889 r90 top
R180 "22R" RES_C_1608X60 179.349,100.889 r90 top
R181 "22R" RES_C_1608X60 165.633,100.889 r90 top
R182 "22R" RES_C_1608X60 158.521,100.889 r90 top
R183 "22R" RES_C_1608X60 151.409,100.889 r90 top
R184 "22R" RES_C_1608X60 144.297,100.889 r90 top
R185 "0R" RES_C_1608X60 137.185,100.889 r90 top
R186 "22R" RES_C_1608X60 122.961,100.889 r90 top
R187 "0R" RES_C_1608X60 130.073,100.889 r90 top
R188 "0R" RES_C_1608X60 108.737,100.889 r90 top
R189 "0R" RES_C_1608X60 115.849,100.889 r90 top
R190 "0R" RES_C_1608X60 95.021,100.889 r90 top
R191 "0R" RES_C_1608X60 102.133,100.889 r90 top
R192 "4.7k" RES_C_1608X60 144.628,150.647 r90 top
R193 "4.7k" RES_C_1608X60 151.74,150.647 r90 top
R194 "4.7k" RES_C_1608X60 158.852,150.647 r90 top
R195 "22R" RES_C_1608X60 122.199,150.647 r90 top
R196 "22R" RES_C_1608X60 115.087,150.647 r90 top
R197 "22R" RES_C_1608X60 102.133,150.647 r90 top
R198 "22R" RES_C_1608X60 95.021,150.647 r90 top
R199 "22R" RES_C_1608X60 143.027,331.191 r90 top
R200 "0R" RES_C_1608X60 135.661,331.191 r90 top
R201 "22R" RES_C_1608X60 128.803,331.191 r90 top
R202 "22R" RES_C_1608X60 115.595,331.191 r90 top
R203 "16.5K" RES_C_1608X60 100.863,331.191 r90 top
R204 "16.5K" RES_C_1608X60 108.229,331.191 r90 top
R205 "0R" RES_C_1608X60 245.11,219.024 r90 top
SB6 "Solder Bridge OFF" "jumper pad" 118.897,20.142 r90 top
SB7 "SB_ON" "jumper pad" 188.316,8.153 r90 top value=0R
SB8 "SB_ON" "jumper pad" 182.474,8.153 r90 top value=0R
SB9 "SB_OFF" "jumper pad" 176.606,8.153 r90 top value=0R
SB10 "SB_ON" "jumper pad" 169.494,8.153 r90 top value=0R
SB11 "SB_ON" "jumper pad" 162.89,8.153 r90 top value=0R
SB12 "SB_OFF" "jumper pad" 155.778,8.153 r90 top value=0R
SB13 "SB_OFF" "jumper pad" 148.666,8.153 r90 top value=0R
SB14 "SB_OFF" "jumper pad" 141.529,8.153 r90 top value=0R
SB15 "SB_ON" "jumper pad" 134.417,8.153 r90 top value=0R
SB16 "SB_OFF" "jumper pad" 127.305,8.153 r90 top value=0R
SB17 "SB_ON" "jumper pad" 120.193,8.153 r90 top value=0R
SB18 "SB_ON" "jumper pad" 113.081,8.153 r90 top value=0R
SB19 "SB_ON" "jumper pad" 105.969,8.153 r90 top value=0R
TP1 "Test Point" TESTPOINT 212.715,34.03 r0 top value=N/A
TP2 "Test Point" TESTPOINT 128.651,277.673 r0 top
TP3 "Test Point" TESTPOINT 326.746,222.148 r0 top value=N/A
TP4 "Test Point" TESTPOINT 315.062,222.148 r0 top value=N/A
TVS1 "USBULC6-2F3" FLIPCHIP4_USBUL_STM 215.138,322.047 r90 top
U1 "THGBMTG5D1LBAIL" BGA153C50P14X14_1150X1300X80 154.952,34.94 r0 top
U4 "IS42S32400F-6BL" TFBGA-90_8X13_ISI 176.581,302.26 r0 top value=IS42S32400J-6BL
U5 "" TFBGA240+25 667.233,201.041 r0 top value=STM32H745XIH6
U6 "ESD-TRANSIL" TVS_ESDA7P60-1U1M 107.163,209.956 r0 top value=ESDA7P60-1U1M
U7 "ESD-TRANSIL" TVS_ESDA7P60-1U1M 95.987,209.956 r0 top value=ESDA7P60-1U1M
U8 "USB3320C-EZK" QFN32_5X5MC_MCH 345.897,319.532 r0 top
U9 "SN65HVD230DR" SOIC127P599X175-8N 142.137,58.727 r0 top
U10 "DS90LV011AQ-Q1" DS90LV011AQ-Q1 134.163,187.858 r0 top
U11 "DS90LV011AQ-Q1" DS90LV011AQ-Q1 108.585,187.858 r0 top
U12 "Module_FPGA_V1" MODULE_FPGA 111.201,235.864 r90 top
U13 "TPS259470ARPWR" IC_TPS25974ARPWR 307.95,277.292 r0 top
U14 "TPS5430DDAR" CONV_TPS5430DDAR 255.118,275.031 r90 top
U15 "" SOT230P700X180-4N 143.002,274.244 r0 top value=LD1117S18TR
U16 "PCA9508DP,118" TSSOP8_SOT505-1_NXP 166.338,58.154 r0 top
U17 "IS66WVS4M8BLL-104NLI" SOIC8_150MIL_N_ISI 138.836,152.044 r0 top
U18 "TPL5010DDCR" TPL5010DDCR 104.019,1.467 r0 top
U19 "TPS7A4533DCQR" DCQ0006A-MFG 152.908,275.412 r0 top
X1 "MU00525-32.768K" XTAL_MU00525_NDK 214.122,209.601 r0 top
X2 "NSC5004D-25M" NSC5004D-25M 190.576,208.839 r0 top
X3 "NSC5004A-24M" NZ2520SH-24M 211.43,321.335 r0 top

## Footprints (in the part's own frame and the unit in brackets; to place one, negate y for a bottom-side part, rotate by r counter-clockwise, add the part's x,y. Pads: shape width x height; smd on the part's side, far side on the other; paste and mask are expansions set on the pad)
5040500991 [mil]
  rect 26x41 smd: 1(236.22,-119.76) 2(177.17,-119.76) 3(118.11,-119.76) 4(59.06,-119.76) 5(0,-119.76) 6(-59.06,-119.76) 7(-118.11,-119.76) 8(-177.17,-119.76) 9(-236.22,-119.76)
  rect 51x73 smd: 10(-326.97,84.57) 11(326.97,84.57)
  silkscreen extent -344,-150 344,125, body extent -354,-129 357,124, height 79
61301021121 [mm] "Pin Header, pitch 2.54 mm, THT, Vertical, dual row, 10p"
  rrect50% 1.65x1.65 hole 1.1: 1(-5.08,-1.27)
  round 1.65 hole 1.1: 2(-5.08,1.27) 3(-2.54,-1.27) 4(-2.54,1.27) 5(0,-1.27) 6(0,1.27) 7(2.54,-1.27) 8(2.54,1.27) 9(5.08,-1.27) 10(5.08,1.27)
  silkscreen extent -7.08,-2.62 6.5,2.62, body extent -6.35,-2.54 6.35,2.54, height 8.59
009159010061911 [mm]
  rect 1x4 smd: 1(0,0) 2(2,0) 3(4,0) 4(6,0) 5(8,0)
  rect 1x4 smd far side: 6(0,0) 7(2,0) 8(4,0) 9(6,0) 10(8,0)
  silkscreen extent -0.7,-2.2 8.7,2.6
BGA153C50P14X14_1150X1300X80 [mm]
  round 0.29 smd: A1(-3.25,3.25) A2(-2.75,3.25) A3(-2.25,3.25) A4(-1.75,3.25) A5(-1.25,3.25) A6(-0.75,3.25) A7(-0.25,3.25) A8(0.25,3.25) A9(0.75,3.25) A10(1.25,3.25) A11(1.75,3.25) A12(2.25,3.25) A13(2.75,3.25) A14(3.25,3.25) B1(-3.25,2.75) B2(-2.75,2.75) B3(-2.25,2.75) B4(-1.75,2.75) B5(-1.25,2.75) B6(-0.75,2.75) B7(-0.25,2.75) B8(0.25,2.75) B9(0.75,2.75) B10(1.25,2.75) B11(1.75,2.75) B12(2.25,2.75) B13(2.75,2.75) B14(3.25,2.75) C1(-3.25,2.25) C2(-2.75,2.25) C3(-2.25,2.25) C4(-1.75,2.25) C5(-1.25,2.25) C6(-0.75,2.25) C7(-0.25,2.25) C8(0.25,2.25) C9(0.75,2.25) C10(1.25,2.25) C11(1.75,2.25) C12(2.25,2.25) C13(2.75,2.25) C14(3.25,2.25) D1(-3.25,1.75) D2(-2.75,1.75) D3(-2.25,1.75) D4(-1.75,1.75) D12(2.25,1.75) D13(2.75,1.75) D14(3.25,1.75) E1(-3.25,1.25) E2(-2.75,1.25) E3(-2.25,1.25) E5(-1.25,1.25) E6(-0.75,1.25) E7(-0.25,1.25) E8(0.25,1.25) E9(0.75,1.25) E10(1.25,1.25) E12(2.25,1.25) E13(2.75,1.25) E14(3.25,1.25) F1(-3.25,0.75) F2(-2.75,0.75) F3(-2.25,0.75) F5(-1.25,0.75) F10(1.25,0.75) F12(2.25,0.75) F13(2.75,0.75) F14(3.25,0.75) G1(-3.25,0.25) G2(-2.75,0.25) G3(-2.25,0.25) G5(-1.25,0.25) G10(1.25,0.25) G12(2.25,0.25) G13(2.75,0.25) G14(3.25,0.25) H1(-3.25,-0.25) H2(-2.75,-0.25) H3(-2.25,-0.25) H5(-1.25,-0.25) H10(1.25,-0.25) H12(2.25,-0.25) H13(2.75,-0.25) H14(3.25,-0.25) J1(-3.25,-0.75) J2(-2.75,-0.75) J3(-2.25,-0.75) J5(-1.25,-0.75) J10(1.25,-0.75) J12(2.25,-0.75) J13(2.75,-0.75) J14(3.25,-0.75) K1(-3.25,-1.25) K2(-2.75,-1.25) K3(-2.25,-1.25) K5(-1.25,-1.25) K6(-0.75,-1.25) K7(-0.25,-1.25) K8(0.25,-1.25) K9(0.75,-1.25) K10(1.25,-1.25) K12(2.25,-1.25) K13(2.75,-1.25) K14(3.25,-1.25) L1(-3.25,-1.75) L2(-2.75,-1.75) L3(-2.25,-1.75) L12(2.25,-1.75) L13(2.75,-1.75) L14(3.25,-1.75) M1(-3.25,-2.25) M2(-2.75,-2.25) M3(-2.25,-2.25) M4(-1.75,-2.25) M5(-1.25,-2.25) M6(-0.75,-2.25) M7(-0.25,-2.25) M8(0.25,-2.25) M9(0.75,-2.25) M10(1.25,-2.25) M11(1.75,-2.25) M12(2.25,-2.25) M13(2.75,-2.25) M14(3.25,-2.25) N1(-3.25,-2.75) N2(-2.75,-2.75) N3(-2.25,-2.75) N4(-1.75,-2.75) N5(-1.25,-2.75) N6(-0.75,-2.75) N7(-0.25,-2.75) N8(0.25,-2.75) N9(0.75,-2.75) N10(1.25,-2.75) N11(1.75,-2.75) N12(2.25,-2.75) N13(2.75,-2.75) N14(3.25,-2.75) P1(-3.25,-3.25) P2(-2.75,-3.25) P3(-2.25,-3.25) P4(-1.75,-3.25) P5(-1.25,-3.25) P6(-0.75,-3.25) P7(-0.25,-3.25) P8(0.25,-3.25) P9(0.75,-3.25) P10(1.25,-3.25) P11(1.75,-3.25) P12(2.25,-3.25) P13(2.75,-3.25) P14(3.25,-3.25)
  silkscreen extent -5.85,-6.5 5.75,6.6, body extent -5.75,-6.5 5.75,6.5, height 0.8
CAP_C_1608X80 [mm] "Chip Capacitor, 2-Leads, Body 1.60x0.80mm, IPC Medium Density"
  rrect50% 0.85x0.95 smd: 1(-0.775,0) 2(0.775,0)
  silkscreen extent -0.9,-0.7 0.9,0.7, body extent -0.87,-0.48 0.87,0.48, height 0.85
CAP_C_1608X80_L [mm] "Chip Capacitor, 2-Leads, Body 1.60x0.80mm, IPC High Density"
  rrect50% 0.75x0.95 smd: 1(-0.725,0) 2(0.725,0)
  silkscreen extent -0.2,-0.5 0.2,0.5, body extent -0.87,-0.48 0.87,0.48, height 0.85
CAP_MP_1608X90 [mm] "Molded Capacitor, 2-Leads, Body 1.60x0.85mm, IPC Medium Density"
  rrect50% 1.1x1 smd mask+0.102: 1(-0.85,0) 2(0.85,0)
  silkscreen extent -2.1,-0.7 1.1,0.7, body extent -0.8,-0.43 0.8,0.43, height 1
CONN_5040500591_MOL [mil]
  rect 26x41 smd paste+0 mask+0: 1(118.11,-119.76) 2(59.06,-119.76) 3(0,-119.76) 4(-59.06,-119.76) 5(-118.11,-119.76)
  rect 51x73 smd paste-36.5 mask-36.5: 6(-208.86,84.57) 7(208.86,84.57)
  silkscreen extent -226,-135 266,125, body extent -237,-134 237,120, height 79
CONN_5040500991_MOL [mil]
  rect 26x41 smd paste+0 mask+0: 1(236.22,-119.76) 2(177.17,-119.76) 3(118.11,-119.76) 4(59.06,-119.76) 5(0,-119.76) 6(-59.06,-119.76) 7(-118.11,-119.76) 8(-177.17,-119.76) 9(-236.22,-119.76)
  rect 51x73 smd paste-36.5 mask-36.5: 10(-326.97,84.57) 11(326.97,84.57)
  silkscreen extent -344,-135 384,125, body extent -355,-140 355,114, height 79
CONV_TPS5430DDAR [mm]
  rrect10% 1.55x0.6 smd mask+0: 1(-2.7,1.905) 2(-2.7,0.635) 3(-2.7,-0.635) 4(-2.7,-1.905) 5(2.7,-1.905) 6(2.7,-0.635) 7(2.7,0.635) 8(2.7,1.905)
  rect 2.95x4.9 smd paste-3 mask+0: 9(0,0)
  round 0.3 hole 0.2 mask+0: 10(-0.65,1.95) 11(0.65,1.95) 12(-0.65,0.65) 13(0.65,0.65) 14(-0.65,-0.65) 15(0.65,-0.65) 16(-0.65,-1.95) 17(0.65,-1.95)
  silkscreen extent -4.17,-2.52 1.95,2.52, body extent -3,-2.45 3,2.45, height 1.7
DCQ0006A-MFG [mm]
  rect 2.05x0.65 smd paste+0 mask+0: 1(-3,2.54) 2(-3,1.27) 3(-3,0) 4(-3,-1.27) 5(-3,-2.54)
  rect 2.05x3.2 smd paste-1.587 mask+0: 6(3,0)
  round 0.5 / inner round 1.524 / far side round 0.5 hole 0.203 paste-2539.97 mask-0.241: 7(3,1.35) 8(3,-1.35) 9(3.775,0) 10(2.225,0)
  silkscreen extent -4.72,-3.3 1.8,3.3, body extent -3.55,-3.25 3.55,3.25, height 1.66
DS90LV011AQ-Q1 [mm]
  rrect50% 1.21x0.59 smd: 1(-1.255,0.95) 2(-1.255,0) 3(-1.255,-0.95) 4(1.255,-0.95) 5(1.255,0.95)
  silkscreen extent -2.51,-1.45 0.8,1.45, body extent -1.4,-1.45 1.4,1.45, height 1.45
ESQ-126-14-G-D [mm]
  rect 1.53x1.53 / inner round 1.53 / far side rect 1.53x1.53 hole 1.02: 01(31.75,-1.27)
  round 1.53 hole 1.02: 02(31.75,1.27) 03(29.21,-1.27) 04(29.21,1.27) 05(26.67,-1.27) 06(26.67,1.27) 07(24.13,-1.27) 08(24.13,1.27) 09(21.59,-1.27) 10(21.59,1.27) 11(19.05,-1.27) 12(19.05,1.27) 13(16.51,-1.27) 14(16.51,1.27) 15(13.97,-1.27) 16(13.97,1.27) 17(11.43,-1.27) 18(11.43,1.27) 19(8.89,-1.27) 20(8.89,1.27) 21(6.35,-1.27) 22(6.35,1.27) 23(3.81,-1.27) 24(3.81,1.27) 25(1.27,-1.27) 26(1.27,1.27) 27(-1.27,-1.27) 28(-1.27,1.27) 29(-3.81,-1.27) 30(-3.81,1.27) 31(-6.35,-1.27) 32(-6.35,1.27) 33(-8.89,-1.27) 34(-8.89,1.27) 35(-11.43,-1.27) 36(-11.43,1.27) 37(-13.97,-1.27) 38(-13.97,1.27) 39(-16.51,-1.27) 40(-16.51,1.27) 41(-19.05,-1.27) 42(-19.05,1.27) 43(-21.59,-1.27) 44(-21.59,1.27) 45(-24.13,-1.27) 46(-24.13,1.27) 47(-26.67,-1.27) 48(-26.67,1.27) 49(-29.21,-1.27) 50(-29.21,1.27) 51(-31.75,-1.27) 52(-31.75,1.27)
  silkscreen extent -33.28,-2.47 34.02,2.47, body extent -33.27,-2.67 33.27,2.41, height 11.2
FLIPCHIP4_USBUL_STM [mil]
  round 10 smd paste+0 mask+0: A1(-7.87,7.87) A2(7.87,7.88) B1(-7.87,-7.88) B2(7.87,-7.87)
  Keep-Out Layer region: -33.25,-33.25 -33.25,33.25 33.25,33.25 33.25,-33.25
  body extent -16,-16 16,16, height 26
FP-4-1437565-1-MFG [mm]
  rect 2.1x1.38 smd paste+0 mask+0: 1(-4.55,2.24) 2(4.55,2.24) 3(-4.55,-2.24) 4(4.55,-2.24)
  silkscreen extent -6.27,-3.15 3.15,3.15
FP-BLM03-0_03-d0_3-IPC_C [mm]
  rect 0.354x0.263 smd paste+0 mask+0: 1(-0.254,0) 2(0.254,0)
  silkscreen extent -0.43,-0.57 0.43,0.57
FP-BLM18-0_15-t0_8-IPC_A [mm]
  rect 1.306x1.058 smd paste+0 mask+0: 1(-0.776,0) 2(0.776,0)
  silkscreen extent -1.43,-0.93 1.43,0.93, body extent -1.93,-1.03 1.93,1.03, height 0.25
FP-TSW-102-07-G-S-MFG [mm]
  rect 1.57x1.57 hole 1.02 paste-2539.97 mask+0: 1(-1.27,0)
  round 1.57 hole 1.02 paste-2539.97 mask+0: 2(1.27,0)
  silkscreen extent -3.42,-1.34 2.73,1.34, body extent -2.83,-1.44 2.83,1.44, height 0.25